# EAGLE board RedBot Accelerometer-Panel-v12a (EAGLE 6.6.0), part 1 of 4
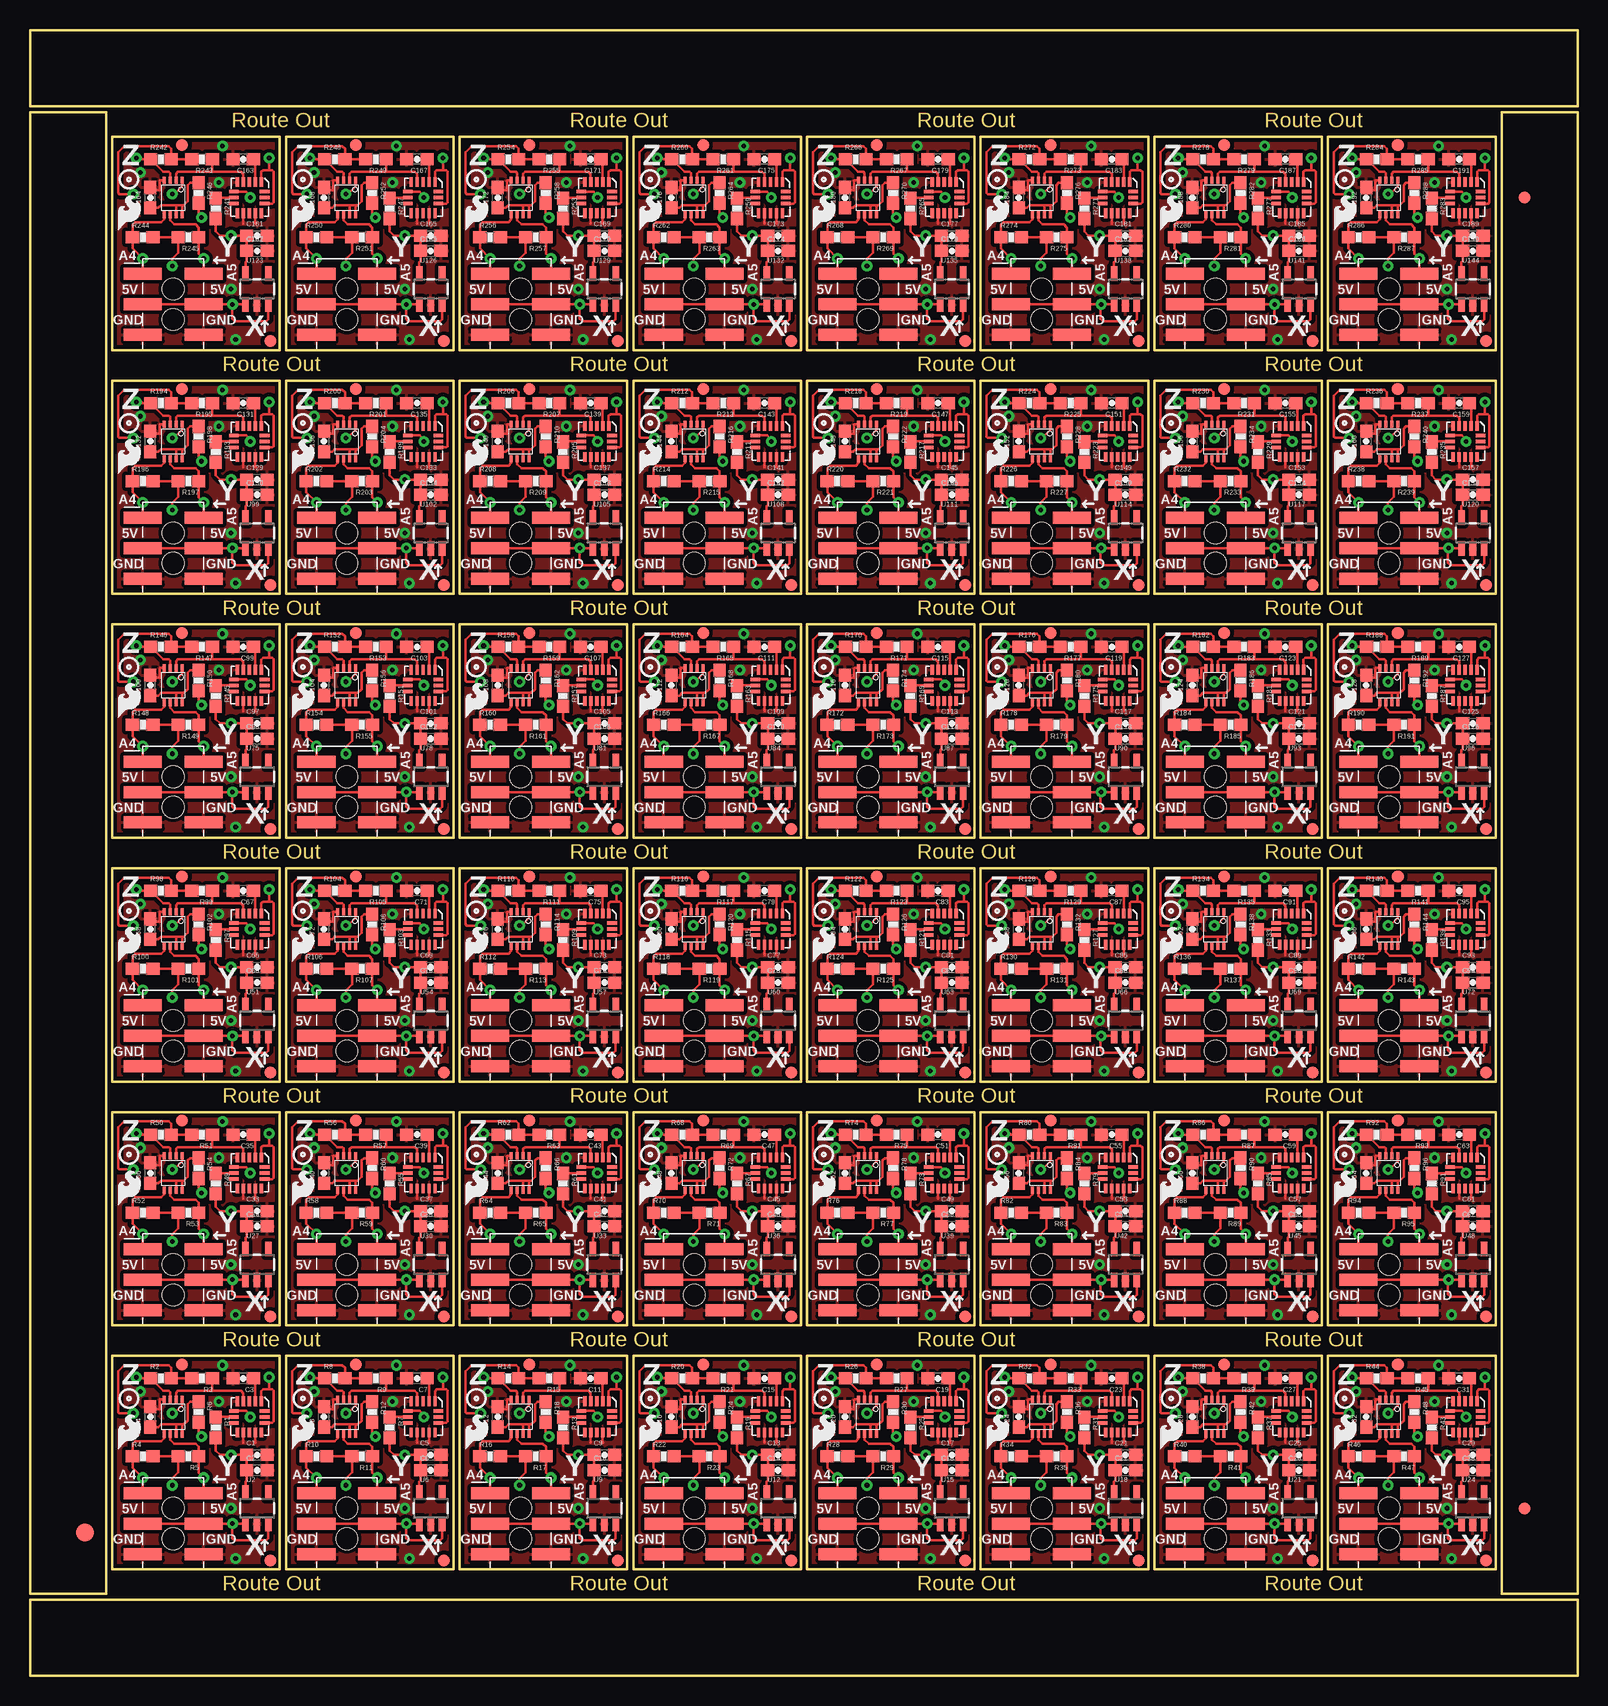
[diagram p0: board, top side]
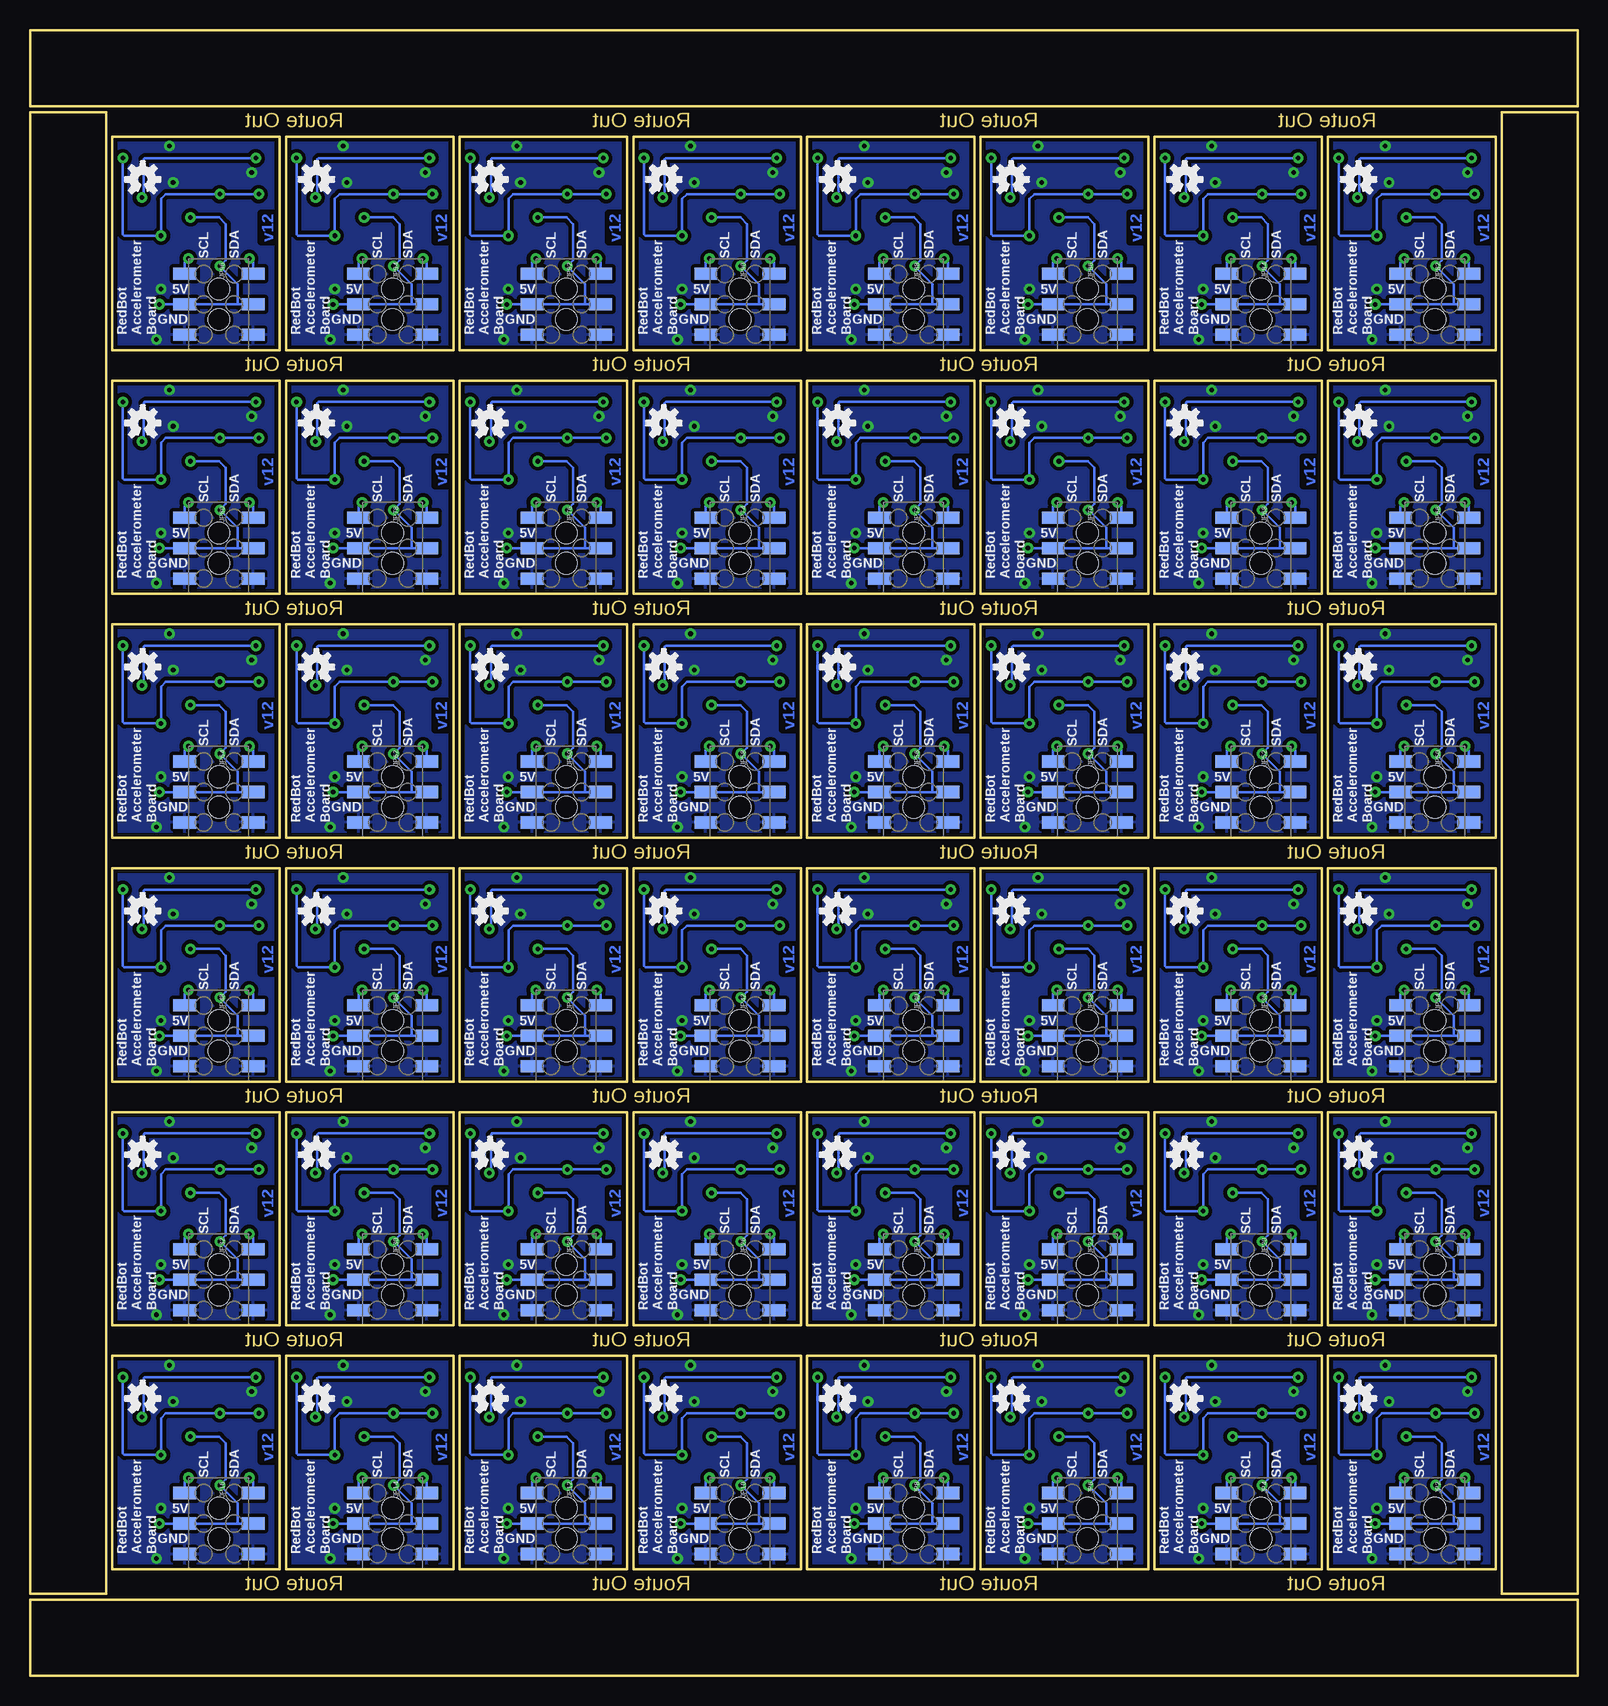
[diagram p1: board, bottom side, seen from below]

Size 129.03 x 137.16 mm. Coordinates in mm from the lower left corner, seen from the top.
Outline: 208 segments
Copper layers (1*16): Top 0.035mm / dielectric 1.5mm / Bottom 0.035mm
Design rules "SparkFun-2-layer": minimum track width 7mil, minimum drill 15mil, track to track 8mil, track to pad 8mil, pad to pad 8mil, via to via 8mil, smd to smd 8mil, copper to edge 8mil, drill to drill 8mil, minimum pad ring 12mil, minimum via ring 10mil, stop-mask expansion 4mil, vias tented up to drill 20mil, thermal gap 10mil

## Footprints (pad centres in the part's own frame; a part is rotated, then mirrored left to right if it is on the bottom)
0603-CAP = smd 1.1 x 1: 1 -0.85,0; 2 0.85,0
FIDUCIAL-1.5X3 = smd 1.5 x 1.5: 1 0,0
FIDUCIAL-1X2 = smd 1 x 1: 1 0,0
2X3_SMT_POSTS = smd 1 x 3.17: 1 -2.54,-2.54; 2 -2.54,2.54; 3 0,-2.54; 4 0,2.54; 5 2.54,-2.54; 6 2.54,2.54 | hole 1.8: -1.27,0; 1.27,0
2X3_SMD = smd 1.02 x 1.9: 1 -2.54,-2.85; 2 -2.54,2.85; 3 0,-2.85; 4 0,2.85; 5 2.54,-2.85; 6 2.54,2.85
0603-RES = smd 1.1 x 1: 1 -0.85,0; 2 0.85,0
MMA8452Q-1:1 = smd 0.8 x 0.275: 1 -1.3,1; 2 -1.3,0.5; 3 -1.3,0; 4 -1.3,-0.5; 5 -1.3,-1; 9 1.3,-1; 10 1.3,-0.5; 11 1.3,0; 12 1.3,0.5; 13 1.3,1 | smd 0.29 x 0.8: 6 -0.5,-1.275; 7 0,-1.275; 8 0.5,-1.275; 14 0.5,1.275; 15 0,1.275; 16 -0.5,1.275
SOT23-5 = smd 0.55 x 1.2: 1 -0.95,-1.3; 2 0,-1.3; 3 0.95,-1.3; 4 0.95,1.3; 5 -0.95,1.3
PCA9306DC-1:1 = smd 0.25 x 0.602: 1 -0.73,-1.446; 2 -0.23,-1.446; 3 0.27,-1.446; 4 0.77,-1.446; 5 0.77,1.431; 6 0.27,1.431; 7 -0.23,1.431; 8 -0.73,1.431

## Placement (x,y rotation side)
C1  0.1uF  [0603-CAP]  18.92,18.41 0 top
C2  4.7uF  [0603-CAP]  18.92,17.14 0 top
C3  0.1uF  [0603-CAP]  17.78,24.79 180 top
C4  0.1uF  [0603-CAP]  10.03,21.59 90 top
C5  0.1uF  [0603-CAP]  33.4,18.41 0 top
C6  4.7uF  [0603-CAP]  33.4,17.14 0 top
C7  0.1uF  [0603-CAP]  32.26,24.79 180 top
C8  0.1uF  [0603-CAP]  24.51,21.59 90 top
C9  0.1uF  [0603-CAP]  47.88,18.41 0 top
C10  4.7uF  [0603-CAP]  47.88,17.14 0 top
C11  0.1uF  [0603-CAP]  46.74,24.79 180 top
C12  0.1uF  [0603-CAP]  38.99,21.59 90 top
C13  0.1uF  [0603-CAP]  62.36,18.41 0 top
C14  4.7uF  [0603-CAP]  62.36,17.14 0 top
C15  0.1uF  [0603-CAP]  61.21,24.79 180 top
C16  0.1uF  [0603-CAP]  53.47,21.59 90 top
C17  0.1uF  [0603-CAP]  76.83,18.41 0 top
C18  4.7uF  [0603-CAP]  76.83,17.14 0 top
C19  0.1uF  [0603-CAP]  75.69,24.79 180 top
C20  0.1uF  [0603-CAP]  67.94,21.59 90 top
C21  0.1uF  [0603-CAP]  91.31,18.41 0 top
C22  4.7uF  [0603-CAP]  91.31,17.14 0 top
C23  0.1uF  [0603-CAP]  90.17,24.79 180 top
C24  0.1uF  [0603-CAP]  82.42,21.59 90 top
C25  0.1uF  [0603-CAP]  105.79,18.41 0 top
C26  4.7uF  [0603-CAP]  105.79,17.14 0 top
C27  0.1uF  [0603-CAP]  104.65,24.79 180 top
C28  0.1uF  [0603-CAP]  96.9,21.59 90 top
C29  0.1uF  [0603-CAP]  120.27,18.41 0 top
C30  4.7uF  [0603-CAP]  120.27,17.14 0 top
C31  0.1uF  [0603-CAP]  119.13,24.79 180 top
C32  0.1uF  [0603-CAP]  111.38,21.59 90 top
C33  0.1uF  [0603-CAP]  18.92,38.73 0 top
C34  4.7uF  [0603-CAP]  18.92,37.47 0 top
C35  0.1uF  [0603-CAP]  17.78,45.11 180 top
C36  0.1uF  [0603-CAP]  10.03,41.91 90 top
C37  0.1uF  [0603-CAP]  33.4,38.73 0 top
C38  4.7uF  [0603-CAP]  33.4,37.47 0 top
C39  0.1uF  [0603-CAP]  32.26,45.11 180 top
C40  0.1uF  [0603-CAP]  24.51,41.91 90 top
C41  0.1uF  [0603-CAP]  47.88,38.73 0 top
C42  4.7uF  [0603-CAP]  47.88,37.47 0 top
C43  0.1uF  [0603-CAP]  46.74,45.11 180 top
C44  0.1uF  [0603-CAP]  38.99,41.91 90 top
C45  0.1uF  [0603-CAP]  62.36,38.73 0 top
C46  4.7uF  [0603-CAP]  62.36,37.47 0 top
C47  0.1uF  [0603-CAP]  61.21,45.11 180 top
C48  0.1uF  [0603-CAP]  53.47,41.91 90 top
C49  0.1uF  [0603-CAP]  76.83,38.73 0 top
C50  4.7uF  [0603-CAP]  76.83,37.47 0 top
C51  0.1uF  [0603-CAP]  75.69,45.11 180 top
C52  0.1uF  [0603-CAP]  67.94,41.91 90 top
C53  0.1uF  [0603-CAP]  91.31,38.73 0 top
C54  4.7uF  [0603-CAP]  91.31,37.47 0 top
C55  0.1uF  [0603-CAP]  90.17,45.11 180 top
C56  0.1uF  [0603-CAP]  82.42,41.91 90 top
C57  0.1uF  [0603-CAP]  105.79,38.73 0 top
C58  4.7uF  [0603-CAP]  105.79,37.47 0 top
C59  0.1uF  [0603-CAP]  104.65,45.11 180 top
C60  0.1uF  [0603-CAP]  96.9,41.91 90 top
C61  0.1uF  [0603-CAP]  120.27,38.73 0 top
C62  4.7uF  [0603-CAP]  120.27,37.47 0 top
C63  0.1uF  [0603-CAP]  119.13,45.11 180 top
C64  0.1uF  [0603-CAP]  111.38,41.91 90 top
C65  0.1uF  [0603-CAP]  18.92,59.05 0 top
C66  4.7uF  [0603-CAP]  18.92,57.78 0 top
C67  0.1uF  [0603-CAP]  17.78,65.43 180 top
C68  0.1uF  [0603-CAP]  10.03,62.23 90 top
C69  0.1uF  [0603-CAP]  33.4,59.05 0 top
C70  4.7uF  [0603-CAP]  33.4,57.78 0 top
C71  0.1uF  [0603-CAP]  32.26,65.43 180 top
C72  0.1uF  [0603-CAP]  24.51,62.23 90 top
C73  0.1uF  [0603-CAP]  47.88,59.05 0 top
C74  4.7uF  [0603-CAP]  47.88,57.78 0 top
C75  0.1uF  [0603-CAP]  46.74,65.43 180 top
C76  0.1uF  [0603-CAP]  38.99,62.23 90 top
C77  0.1uF  [0603-CAP]  62.36,59.05 0 top
C78  4.7uF  [0603-CAP]  62.36,57.78 0 top
C79  0.1uF  [0603-CAP]  61.21,65.43 180 top
C80  0.1uF  [0603-CAP]  53.47,62.23 90 top
C81  0.1uF  [0603-CAP]  76.83,59.05 0 top
C82  4.7uF  [0603-CAP]  76.83,57.78 0 top
C83  0.1uF  [0603-CAP]  75.69,65.43 180 top
C84  0.1uF  [0603-CAP]  67.94,62.23 90 top
C85  0.1uF  [0603-CAP]  91.31,59.05 0 top
C86  4.7uF  [0603-CAP]  91.31,57.78 0 top
C87  0.1uF  [0603-CAP]  90.17,65.43 180 top
C88  0.1uF  [0603-CAP]  82.42,62.23 90 top
C89  0.1uF  [0603-CAP]  105.79,59.05 0 top
C90  4.7uF  [0603-CAP]  105.79,57.78 0 top
C91  0.1uF  [0603-CAP]  104.65,65.43 180 top
C92  0.1uF  [0603-CAP]  96.9,62.23 90 top
C93  0.1uF  [0603-CAP]  120.27,59.05 0 top
C94  4.7uF  [0603-CAP]  120.27,57.78 0 top
C95  0.1uF  [0603-CAP]  119.13,65.43 180 top
C96  0.1uF  [0603-CAP]  111.38,62.23 90 top
C97  0.1uF  [0603-CAP]  18.92,79.38 0 top
C98  4.7uF  [0603-CAP]  18.92,78.11 0 top
C99  0.1uF  [0603-CAP]  17.78,85.75 180 top
C100  0.1uF  [0603-CAP]  10.03,82.55 90 top
C101  0.1uF  [0603-CAP]  33.4,79.38 0 top
C102  4.7uF  [0603-CAP]  33.4,78.11 0 top
C103  0.1uF  [0603-CAP]  32.26,85.75 180 top
C104  0.1uF  [0603-CAP]  24.51,82.55 90 top
C105  0.1uF  [0603-CAP]  47.88,79.38 0 top
C106  4.7uF  [0603-CAP]  47.88,78.11 0 top
C107  0.1uF  [0603-CAP]  46.74,85.75 180 top
C108  0.1uF  [0603-CAP]  38.99,82.55 90 top
C109  0.1uF  [0603-CAP]  62.36,79.38 0 top
C110  4.7uF  [0603-CAP]  62.36,78.11 0 top
C111  0.1uF  [0603-CAP]  61.21,85.75 180 top
C112  0.1uF  [0603-CAP]  53.47,82.55 90 top
C113  0.1uF  [0603-CAP]  76.83,79.38 0 top
C114  4.7uF  [0603-CAP]  76.83,78.11 0 top
C115  0.1uF  [0603-CAP]  75.69,85.75 180 top
C116  0.1uF  [0603-CAP]  67.94,82.55 90 top
C117  0.1uF  [0603-CAP]  91.31,79.38 0 top
C118  4.7uF  [0603-CAP]  91.31,78.11 0 top
C119  0.1uF  [0603-CAP]  90.17,85.75 180 top
C120  0.1uF  [0603-CAP]  82.42,82.55 90 top
C121  0.1uF  [0603-CAP]  105.79,79.38 0 top
C122  4.7uF  [0603-CAP]  105.79,78.11 0 top
C123  0.1uF  [0603-CAP]  104.65,85.75 180 top
C124  0.1uF  [0603-CAP]  96.9,82.55 90 top
C125  0.1uF  [0603-CAP]  120.27,79.38 0 top
C126  4.7uF  [0603-CAP]  120.27,78.11 0 top
C127  0.1uF  [0603-CAP]  119.13,85.75 180 top
C128  0.1uF  [0603-CAP]  111.38,82.55 90 top
C129  0.1uF  [0603-CAP]  18.92,99.69 0 top
C130  4.7uF  [0603-CAP]  18.92,98.42 0 top
C131  0.1uF  [0603-CAP]  17.78,106.07 180 top
C132  0.1uF  [0603-CAP]  10.03,102.87 90 top
C133  0.1uF  [0603-CAP]  33.4,99.69 0 top
C134  4.7uF  [0603-CAP]  33.4,98.42 0 top
C135  0.1uF  [0603-CAP]  32.26,106.07 180 top
C136  0.1uF  [0603-CAP]  24.51,102.87 90 top
C137  0.1uF  [0603-CAP]  47.88,99.69 0 top
C138  4.7uF  [0603-CAP]  47.88,98.42 0 top
C139  0.1uF  [0603-CAP]  46.74,106.07 180 top
C140  0.1uF  [0603-CAP]  38.99,102.87 90 top
C141  0.1uF  [0603-CAP]  62.36,99.69 0 top
C142  4.7uF  [0603-CAP]  62.36,98.42 0 top
C143  0.1uF  [0603-CAP]  61.21,106.07 180 top
C144  0.1uF  [0603-CAP]  53.47,102.87 90 top
C145  0.1uF  [0603-CAP]  76.83,99.69 0 top
C146  4.7uF  [0603-CAP]  76.83,98.42 0 top
C147  0.1uF  [0603-CAP]  75.69,106.07 180 top
C148  0.1uF  [0603-CAP]  67.94,102.87 90 top
C149  0.1uF  [0603-CAP]  91.31,99.69 0 top
C150  4.7uF  [0603-CAP]  91.31,98.42 0 top
C151  0.1uF  [0603-CAP]  90.17,106.07 180 top
C152  0.1uF  [0603-CAP]  82.42,102.87 90 top
C153  0.1uF  [0603-CAP]  105.79,99.69 0 top
C154  4.7uF  [0603-CAP]  105.79,98.42 0 top
C155  0.1uF  [0603-CAP]  104.65,106.07 180 top
C156  0.1uF  [0603-CAP]  96.9,102.87 90 top
C157  0.1uF  [0603-CAP]  120.27,99.69 0 top
C158  4.7uF  [0603-CAP]  120.27,98.42 0 top
C159  0.1uF  [0603-CAP]  119.13,106.07 180 top
C160  0.1uF  [0603-CAP]  111.38,102.87 90 top
C161  0.1uF  [0603-CAP]  18.92,120.02 0 top
C162  4.7uF  [0603-CAP]  18.92,118.75 0 top
C163  0.1uF  [0603-CAP]  17.78,126.39 180 top
C164  0.1uF  [0603-CAP]  10.03,123.19 90 top
C165  0.1uF  [0603-CAP]  33.4,120.02 0 top
C166  4.7uF  [0603-CAP]  33.4,118.75 0 top
C167  0.1uF  [0603-CAP]  32.26,126.39 180 top
C168  0.1uF  [0603-CAP]  24.51,123.19 90 top
C169  0.1uF  [0603-CAP]  47.88,120.02 0 top
C170  4.7uF  [0603-CAP]  47.88,118.75 0 top
C171  0.1uF  [0603-CAP]  46.74,126.39 180 top
C172  0.1uF  [0603-CAP]  38.99,123.19 90 top
C173  0.1uF  [0603-CAP]  62.36,120.02 0 top
C174  4.7uF  [0603-CAP]  62.36,118.75 0 top
C175  0.1uF  [0603-CAP]  61.21,126.39 180 top
C176  0.1uF  [0603-CAP]  53.47,123.19 90 top
C177  0.1uF  [0603-CAP]  76.83,120.02 0 top
C178  4.7uF  [0603-CAP]  76.83,118.75 0 top
C179  0.1uF  [0603-CAP]  75.69,126.39 180 top
C180  0.1uF  [0603-CAP]  67.94,123.19 90 top
C181  0.1uF  [0603-CAP]  91.31,120.02 0 top
C182  4.7uF  [0603-CAP]  91.31,118.75 0 top
C183  0.1uF  [0603-CAP]  90.17,126.39 180 top
C184  0.1uF  [0603-CAP]  82.42,123.19 90 top
C185  0.1uF  [0603-CAP]  105.79,120.02 0 top
C186  4.7uF  [0603-CAP]  105.79,118.75 0 top
C187  0.1uF  [0603-CAP]  104.65,126.39 180 top
C188  0.1uF  [0603-CAP]  96.9,123.19 90 top
C189  0.1uF  [0603-CAP]  120.27,120.02 0 top
C190  4.7uF  [0603-CAP]  120.27,118.75 0 top
C191  0.1uF  [0603-CAP]  119.13,126.39 180 top
C192  0.1uF  [0603-CAP]  111.38,123.19 90 top
E$1  [FIDUCIAL-1.5X3]  4.57,11.94 0 top
E$2  [FIDUCIAL-1X2]  124.59,13.97 0 top
E$3  [FIDUCIAL-1X2]  124.59,123.19 180 top
FID1  FIDUCIAL1X2  [FIDUCIAL-1X2]  12.67,25.96 0 top
FID2  FIDUCIAL1X2  [FIDUCIAL-1X2]  34.52,9.63 0 top
FID3  FIDUCIAL1X2  [FIDUCIAL-1X2]  20.04,9.63 0 top
FID4  FIDUCIAL1X2  [FIDUCIAL-1X2]  27.15,25.96 0 top
FID5  FIDUCIAL1X2  [FIDUCIAL-1X2]  49,9.63 0 top
FID6  FIDUCIAL1X2  [FIDUCIAL-1X2]  41.63,25.96 0 top
FID7  FIDUCIAL1X2  [FIDUCIAL-1X2]  63.47,9.63 0 top
FID8  FIDUCIAL1X2  [FIDUCIAL-1X2]  56.11,25.96 0 top
FID9  FIDUCIAL1X2  [FIDUCIAL-1X2]  77.95,9.63 0 top
FID10  FIDUCIAL1X2  [FIDUCIAL-1X2]  70.59,25.96 0 top
FID11  FIDUCIAL1X2  [FIDUCIAL-1X2]  92.43,9.63 0 top
FID12  FIDUCIAL1X2  [FIDUCIAL-1X2]  85.06,25.96 0 top
FID13  FIDUCIAL1X2  [FIDUCIAL-1X2]  106.91,9.63 0 top
FID14  FIDUCIAL1X2  [FIDUCIAL-1X2]  99.54,25.96 0 top
FID15  FIDUCIAL1X2  [FIDUCIAL-1X2]  121.39,9.63 0 top
FID16  FIDUCIAL1X2  [FIDUCIAL-1X2]  114.02,25.96 0 top
FID17  FIDUCIAL1X2  [FIDUCIAL-1X2]  20.04,29.95 0 top
FID18  FIDUCIAL1X2  [FIDUCIAL-1X2]  12.67,46.28 0 top
FID19  FIDUCIAL1X2  [FIDUCIAL-1X2]  34.52,29.95 0 top
FID20  FIDUCIAL1X2  [FIDUCIAL-1X2]  27.15,46.28 0 top
FID21  FIDUCIAL1X2  [FIDUCIAL-1X2]  49,29.95 0 top
FID22  FIDUCIAL1X2  [FIDUCIAL-1X2]  41.63,46.28 0 top
FID23  FIDUCIAL1X2  [FIDUCIAL-1X2]  63.47,29.95 0 top
FID24  FIDUCIAL1X2  [FIDUCIAL-1X2]  56.11,46.28 0 top
FID25  FIDUCIAL1X2  [FIDUCIAL-1X2]  77.95,29.95 0 top
FID26  FIDUCIAL1X2  [FIDUCIAL-1X2]  70.59,46.28 0 top
FID27  FIDUCIAL1X2  [FIDUCIAL-1X2]  92.43,29.95 0 top
FID28  FIDUCIAL1X2  [FIDUCIAL-1X2]  85.06,46.28 0 top
FID29  FIDUCIAL1X2  [FIDUCIAL-1X2]  106.91,29.95 0 top
FID30  FIDUCIAL1X2  [FIDUCIAL-1X2]  99.54,46.28 0 top
FID31  FIDUCIAL1X2  [FIDUCIAL-1X2]  121.39,29.95 0 top
FID32  FIDUCIAL1X2  [FIDUCIAL-1X2]  114.02,46.28 0 top
FID33  FIDUCIAL1X2  [FIDUCIAL-1X2]  20.04,50.27 0 top
FID34  FIDUCIAL1X2  [FIDUCIAL-1X2]  12.67,66.6 0 top
FID35  FIDUCIAL1X2  [FIDUCIAL-1X2]  34.52,50.27 0 top
FID36  FIDUCIAL1X2  [FIDUCIAL-1X2]  27.15,66.6 0 top
FID37  FIDUCIAL1X2  [FIDUCIAL-1X2]  49,50.27 0 top
FID38  FIDUCIAL1X2  [FIDUCIAL-1X2]  41.63,66.6 0 top
FID39  FIDUCIAL1X2  [FIDUCIAL-1X2]  63.47,50.27 0 top
FID40  FIDUCIAL1X2  [FIDUCIAL-1X2]  56.11,66.6 0 top
FID41  FIDUCIAL1X2  [FIDUCIAL-1X2]  77.95,50.27 0 top
FID42  FIDUCIAL1X2  [FIDUCIAL-1X2]  70.59,66.6 0 top
FID43  FIDUCIAL1X2  [FIDUCIAL-1X2]  92.43,50.27 0 top
FID44  FIDUCIAL1X2  [FIDUCIAL-1X2]  85.06,66.6 0 top
FID45  FIDUCIAL1X2  [FIDUCIAL-1X2]  106.91,50.27 0 top
FID46  FIDUCIAL1X2  [FIDUCIAL-1X2]  99.54,66.6 0 top
FID47  FIDUCIAL1X2  [FIDUCIAL-1X2]  121.39,50.27 0 top
FID48  FIDUCIAL1X2  [FIDUCIAL-1X2]  114.02,66.6 0 top
FID49  FIDUCIAL1X2  [FIDUCIAL-1X2]  20.04,70.59 0 top
FID50  FIDUCIAL1X2  [FIDUCIAL-1X2]  12.67,86.92 0 top
FID51  FIDUCIAL1X2  [FIDUCIAL-1X2]  34.52,70.59 0 top
FID52  FIDUCIAL1X2  [FIDUCIAL-1X2]  27.15,86.92 0 top
FID53  FIDUCIAL1X2  [FIDUCIAL-1X2]  49,70.59 0 top
FID54  FIDUCIAL1X2  [FIDUCIAL-1X2]  41.63,86.92 0 top
FID55  FIDUCIAL1X2  [FIDUCIAL-1X2]  63.47,70.59 0 top
FID56  FIDUCIAL1X2  [FIDUCIAL-1X2]  56.11,86.92 0 top
FID57  FIDUCIAL1X2  [FIDUCIAL-1X2]  77.95,70.59 0 top
FID58  FIDUCIAL1X2  [FIDUCIAL-1X2]  70.59,86.92 0 top
FID59  FIDUCIAL1X2  [FIDUCIAL-1X2]  92.43,70.59 0 top
FID60  FIDUCIAL1X2  [FIDUCIAL-1X2]  85.06,86.92 0 top
FID61  FIDUCIAL1X2  [FIDUCIAL-1X2]  106.91,70.59 0 top
FID62  FIDUCIAL1X2  [FIDUCIAL-1X2]  99.54,86.92 0 top
FID63  FIDUCIAL1X2  [FIDUCIAL-1X2]  121.39,70.59 0 top
FID64  FIDUCIAL1X2  [FIDUCIAL-1X2]  114.02,86.92 0 top
FID65  FIDUCIAL1X2  [FIDUCIAL-1X2]  20.04,90.91 0 top
FID66  FIDUCIAL1X2  [FIDUCIAL-1X2]  12.67,107.24 0 top
FID67  FIDUCIAL1X2  [FIDUCIAL-1X2]  34.52,90.91 0 top
FID68  FIDUCIAL1X2  [FIDUCIAL-1X2]  27.15,107.24 0 top
FID69  FIDUCIAL1X2  [FIDUCIAL-1X2]  49,90.91 0 top
FID70  FIDUCIAL1X2  [FIDUCIAL-1X2]  41.63,107.24 0 top
FID71  FIDUCIAL1X2  [FIDUCIAL-1X2]  63.47,90.91 0 top
FID72  FIDUCIAL1X2  [FIDUCIAL-1X2]  56.11,107.24 0 top
FID73  FIDUCIAL1X2  [FIDUCIAL-1X2]  77.95,90.91 0 top
FID74  FIDUCIAL1X2  [FIDUCIAL-1X2]  70.59,107.24 0 top
FID75  FIDUCIAL1X2  [FIDUCIAL-1X2]  92.43,90.91 0 top
FID76  FIDUCIAL1X2  [FIDUCIAL-1X2]  85.06,107.24 0 top
FID77  FIDUCIAL1X2  [FIDUCIAL-1X2]  106.91,90.91 0 top
FID78  FIDUCIAL1X2  [FIDUCIAL-1X2]  99.54,107.24 0 top
FID79  FIDUCIAL1X2  [FIDUCIAL-1X2]  121.39,90.91 0 top
FID80  FIDUCIAL1X2  [FIDUCIAL-1X2]  114.02,107.24 0 top
FID81  FIDUCIAL1X2  [FIDUCIAL-1X2]  20.04,111.23 0 top
FID82  FIDUCIAL1X2  [FIDUCIAL-1X2]  12.67,127.56 0 top
FID83  FIDUCIAL1X2  [FIDUCIAL-1X2]  34.52,111.23 0 top
FID84  FIDUCIAL1X2  [FIDUCIAL-1X2]  27.15,127.56 0 top
FID85  FIDUCIAL1X2  [FIDUCIAL-1X2]  49,111.23 0 top
FID86  FIDUCIAL1X2  [FIDUCIAL-1X2]  41.63,127.56 0 top
FID87  FIDUCIAL1X2  [FIDUCIAL-1X2]  63.47,111.23 0 top
FID88  FIDUCIAL1X2  [FIDUCIAL-1X2]  56.11,127.56 0 top
FID89  FIDUCIAL1X2  [FIDUCIAL-1X2]  77.95,111.23 0 top
FID90  FIDUCIAL1X2  [FIDUCIAL-1X2]  70.59,127.56 0 top
FID91  FIDUCIAL1X2  [FIDUCIAL-1X2]  92.43,111.23 0 top
FID92  FIDUCIAL1X2  [FIDUCIAL-1X2]  85.06,127.56 0 top
FID93  FIDUCIAL1X2  [FIDUCIAL-1X2]  106.91,111.23 0 top
FID94  FIDUCIAL1X2  [FIDUCIAL-1X2]  99.54,127.56 0 top
FID95  FIDUCIAL1X2  [FIDUCIAL-1X2]  121.39,111.23 0 top
FID96  FIDUCIAL1X2  [FIDUCIAL-1X2]  114.02,127.56 0 top
JP1  [2X3_SMT_POSTS]  11.94,12.7 270 top
JP2  [2X3_SMD]  11.94,12.7 270 bottom
JP3  [2X3_SMT_POSTS]  26.42,12.7 270 top
JP4  [2X3_SMD]  26.42,12.7 270 bottom
JP5  [2X3_SMT_POSTS]  40.89,12.7 270 top
JP6  [2X3_SMD]  40.89,12.7 270 bottom
JP7  [2X3_SMT_POSTS]  55.37,12.7 270 top
JP8  [2X3_SMD]  55.37,12.7 270 bottom
JP9  [2X3_SMT_POSTS]  69.85,12.7 270 top
JP10  [2X3_SMD]  69.85,12.7 270 bottom
JP11  [2X3_SMT_POSTS]  84.33,12.7 270 top
JP12  [2X3_SMD]  84.33,12.7 270 bottom
JP13  [2X3_SMT_POSTS]  98.81,12.7 270 top
JP14  [2X3_SMD]  98.81,12.7 270 bottom
JP15  [2X3_SMT_POSTS]  113.28,12.7 270 top
JP16  [2X3_SMD]  113.28,12.7 270 bottom
JP17  [2X3_SMT_POSTS]  11.94,33.02 270 top
JP18  [2X3_SMD]  11.94,33.02 270 bottom
JP19  [2X3_SMT_POSTS]  26.42,33.02 270 top
JP20  [2X3_SMD]  26.42,33.02 270 bottom
JP21  [2X3_SMT_POSTS]  40.89,33.02 270 top
JP22  [2X3_SMD]  40.89,33.02 270 bottom
JP23  [2X3_SMT_POSTS]  55.37,33.02 270 top
JP24  [2X3_SMD]  55.37,33.02 270 bottom
JP25  [2X3_SMT_POSTS]  69.85,33.02 270 top
JP26  [2X3_SMD]  69.85,33.02 270 bottom
JP27  [2X3_SMT_POSTS]  84.33,33.02 270 top
JP28  [2X3_SMD]  84.33,33.02 270 bottom
JP29  [2X3_SMT_POSTS]  98.81,33.02 270 top
JP30  [2X3_SMD]  98.81,33.02 270 bottom
JP31  [2X3_SMT_POSTS]  113.28,33.02 270 top
JP32  [2X3_SMD]  113.28,33.02 270 bottom
JP33  [2X3_SMT_POSTS]  11.94,53.34 270 top
JP34  [2X3_SMD]  11.94,53.34 270 bottom
JP35  [2X3_SMT_POSTS]  26.42,53.34 270 top
JP36  [2X3_SMD]  26.42,53.34 270 bottom
JP37  [2X3_SMT_POSTS]  40.89,53.34 270 top
JP38  [2X3_SMD]  40.89,53.34 270 bottom
JP39  [2X3_SMT_POSTS]  55.37,53.34 270 top
JP40  [2X3_SMD]  55.37,53.34 270 bottom
JP41  [2X3_SMT_POSTS]  69.85,53.34 270 top
JP42  [2X3_SMD]  69.85,53.34 270 bottom
JP43  [2X3_SMT_POSTS]  84.33,53.34 270 top
JP44  [2X3_SMD]  84.33,53.34 270 bottom
JP45  [2X3_SMT_POSTS]  98.81,53.34 270 top
JP46  [2X3_SMD]  98.81,53.34 270 bottom
JP47  [2X3_SMT_POSTS]  113.28,53.34 270 top
JP48  [2X3_SMD]  113.28,53.34 270 bottom
JP49  [2X3_SMT_POSTS]  11.94,73.66 270 top
JP50  [2X3_SMD]  11.94,73.66 270 bottom
JP51  [2X3_SMT_POSTS]  26.42,73.66 270 top
JP52  [2X3_SMD]  26.42,73.66 270 bottom
JP53  [2X3_SMT_POSTS]  40.89,73.66 270 top
JP54  [2X3_SMD]  40.89,73.66 270 bottom
JP55  [2X3_SMT_POSTS]  55.37,73.66 270 top
JP56  [2X3_SMD]  55.37,73.66 270 bottom
JP57  [2X3_SMT_POSTS]  69.85,73.66 270 top
JP58  [2X3_SMD]  69.85,73.66 270 bottom
JP59  [2X3_SMT_POSTS]  84.33,73.66 270 top
JP60  [2X3_SMD]  84.33,73.66 270 bottom
JP61  [2X3_SMT_POSTS]  98.81,73.66 270 top
JP62  [2X3_SMD]  98.81,73.66 270 bottom
JP63  [2X3_SMT_POSTS]  113.28,73.66 270 top
JP64  [2X3_SMD]  113.28,73.66 270 bottom
JP65  [2X3_SMT_POSTS]  11.94,93.98 270 top
JP66  [2X3_SMD]  11.94,93.98 270 bottom
JP67  [2X3_SMT_POSTS]  26.42,93.98 270 top
JP68  [2X3_SMD]  26.42,93.98 270 bottom
JP69  [2X3_SMT_POSTS]  40.89,93.98 270 top
JP70  [2X3_SMD]  40.89,93.98 270 bottom
JP71  [2X3_SMT_POSTS]  55.37,93.98 270 top
JP72  [2X3_SMD]  55.37,93.98 270 bottom
JP73  [2X3_SMT_POSTS]  69.85,93.98 270 top
JP74  [2X3_SMD]  69.85,93.98 270 bottom
JP75  [2X3_SMT_POSTS]  84.33,93.98 270 top
JP76  [2X3_SMD]  84.33,93.98 270 bottom
JP77  [2X3_SMT_POSTS]  98.81,93.98 270 top
JP78  [2X3_SMD]  98.81,93.98 270 bottom
JP79  [2X3_SMT_POSTS]  113.28,93.98 270 top
JP80  [2X3_SMD]  113.28,93.98 270 bottom
JP81  [2X3_SMT_POSTS]  11.94,114.3 270 top
JP82  [2X3_SMD]  11.94,114.3 270 bottom
JP83  [2X3_SMT_POSTS]  26.42,114.3 270 top
JP84  [2X3_SMD]  26.42,114.3 270 bottom
JP85  [2X3_SMT_POSTS]  40.89,114.3 270 top
JP86  [2X3_SMD]  40.89,114.3 270 bottom
JP87  [2X3_SMT_POSTS]  55.37,114.3 270 top
JP88  [2X3_SMD]  55.37,114.3 270 bottom
JP89  [2X3_SMT_POSTS]  69.85,114.3 270 top
JP90  [2X3_SMD]  69.85,114.3 270 bottom
JP91  [2X3_SMT_POSTS]  84.33,114.3 270 top
JP92  [2X3_SMD]  84.33,114.3 270 bottom
JP93  [2X3_SMT_POSTS]  98.81,114.3 270 top
JP94  [2X3_SMD]  98.81,114.3 270 bottom
JP95  [2X3_SMT_POSTS]  113.28,114.3 270 top
JP96  [2X3_SMD]  113.28,114.3 270 bottom
LOGO1  LOGO-SFESK  [SFE-LOGO-FLAME]  7.37,18.92 0 top
LOGO2  OSHW-LOGOS  [OSHW-LOGO-S]  18.29,23.11 0 bottom
LOGO3  LOGO-SFESK  [SFE-LOGO-FLAME]  21.84,18.92 0 top
LOGO4  OSHW-LOGOS  [OSHW-LOGO-S]  32.77,23.11 0 bottom
LOGO5  LOGO-SFESK  [SFE-LOGO-FLAME]  36.32,18.92 0 top
LOGO6  OSHW-LOGOS  [OSHW-LOGO-S]  47.24,23.11 0 bottom
LOGO7  LOGO-SFESK  [SFE-LOGO-FLAME]  50.8,18.92 0 top
LOGO8  OSHW-LOGOS  [OSHW-LOGO-S]  61.72,23.11 0 bottom
LOGO9  LOGO-SFESK  [SFE-LOGO-FLAME]  65.28,18.92 0 top
LOGO10  OSHW-LOGOS  [OSHW-LOGO-S]  76.2,23.11 0 bottom
LOGO11  LOGO-SFESK  [SFE-LOGO-FLAME]  79.76,18.92 0 top
LOGO12  OSHW-LOGOS  [OSHW-LOGO-S]  90.68,23.11 0 bottom
LOGO13  LOGO-SFESK  [SFE-LOGO-FLAME]  94.23,18.92 0 top
LOGO14  OSHW-LOGOS  [OSHW-LOGO-S]  105.16,23.11 0 bottom
LOGO15  LOGO-SFESK  [SFE-LOGO-FLAME]  108.71,18.92 0 top
LOGO16  OSHW-LOGOS  [OSHW-LOGO-S]  119.63,23.11 0 bottom
LOGO17  LOGO-SFESK  [SFE-LOGO-FLAME]  7.37,39.24 0 top
LOGO18  OSHW-LOGOS  [OSHW-LOGO-S]  18.29,43.43 0 bottom
LOGO19  LOGO-SFESK  [SFE-LOGO-FLAME]  21.84,39.24 0 top
LOGO20  OSHW-LOGOS  [OSHW-LOGO-S]  32.77,43.43 0 bottom
LOGO21  LOGO-SFESK  [SFE-LOGO-FLAME]  36.32,39.24 0 top
LOGO22  OSHW-LOGOS  [OSHW-LOGO-S]  47.24,43.43 0 bottom
LOGO23  LOGO-SFESK  [SFE-LOGO-FLAME]  50.8,39.24 0 top
LOGO24  OSHW-LOGOS  [OSHW-LOGO-S]  61.72,43.43 0 bottom
LOGO25  LOGO-SFESK  [SFE-LOGO-FLAME]  65.28,39.24 0 top
LOGO26  OSHW-LOGOS  [OSHW-LOGO-S]  76.2,43.43 0 bottom
LOGO27  LOGO-SFESK  [SFE-LOGO-FLAME]  79.76,39.24 0 top
LOGO28  OSHW-LOGOS  [OSHW-LOGO-S]  90.68,43.43 0 bottom
LOGO29  LOGO-SFESK  [SFE-LOGO-FLAME]  94.23,39.24 0 top
LOGO30  OSHW-LOGOS  [OSHW-LOGO-S]  105.16,43.43 0 bottom
LOGO31  LOGO-SFESK  [SFE-LOGO-FLAME]  108.71,39.24 0 top
LOGO32  OSHW-LOGOS  [OSHW-LOGO-S]  119.63,43.43 0 bottom
LOGO33  LOGO-SFESK  [SFE-LOGO-FLAME]  7.37,59.56 0 top
LOGO34  OSHW-LOGOS  [OSHW-LOGO-S]  18.29,63.75 0 bottom
LOGO35  LOGO-SFESK  [SFE-LOGO-FLAME]  21.84,59.56 0 top
LOGO36  OSHW-LOGOS  [OSHW-LOGO-S]  32.77,63.75 0 bottom
LOGO37  LOGO-SFESK  [SFE-LOGO-FLAME]  36.32,59.56 0 top
LOGO38  OSHW-LOGOS  [OSHW-LOGO-S]  47.24,63.75 0 bottom
LOGO39  LOGO-SFESK  [SFE-LOGO-FLAME]  50.8,59.56 0 top
LOGO40  OSHW-LOGOS  [OSHW-LOGO-S]  61.72,63.75 0 bottom
LOGO41  LOGO-SFESK  [SFE-LOGO-FLAME]  65.28,59.56 0 top
LOGO42  OSHW-LOGOS  [OSHW-LOGO-S]  76.2,63.75 0 bottom
LOGO43  LOGO-SFESK  [SFE-LOGO-FLAME]  79.76,59.56 0 top
LOGO44  OSHW-LOGOS  [OSHW-LOGO-S]  90.68,63.75 0 bottom
LOGO45  LOGO-SFESK  [SFE-LOGO-FLAME]  94.23,59.56 0 top
LOGO46  OSHW-LOGOS  [OSHW-LOGO-S]  105.16,63.75 0 bottom
LOGO47  LOGO-SFESK  [SFE-LOGO-FLAME]  108.71,59.56 0 top
LOGO48  OSHW-LOGOS  [OSHW-LOGO-S]  119.63,63.75 0 bottom
LOGO49  LOGO-SFESK  [SFE-LOGO-FLAME]  7.37,79.88 0 top
LOGO50  OSHW-LOGOS  [OSHW-LOGO-S]  18.29,84.07 0 bottom
LOGO51  LOGO-SFESK  [SFE-LOGO-FLAME]  21.84,79.88 0 top
LOGO52  OSHW-LOGOS  [OSHW-LOGO-S]  32.77,84.07 0 bottom
LOGO53  LOGO-SFESK  [SFE-LOGO-FLAME]  36.32,79.88 0 top
LOGO54  OSHW-LOGOS  [OSHW-LOGO-S]  47.24,84.07 0 bottom
LOGO55  LOGO-SFESK  [SFE-LOGO-FLAME]  50.8,79.88 0 top
LOGO56  OSHW-LOGOS  [OSHW-LOGO-S]  61.72,84.07 0 bottom
LOGO57  LOGO-SFESK  [SFE-LOGO-FLAME]  65.28,79.88 0 top
LOGO58  OSHW-LOGOS  [OSHW-LOGO-S]  76.2,84.07 0 bottom
LOGO59  LOGO-SFESK  [SFE-LOGO-FLAME]  79.76,79.88 0 top
LOGO60  OSHW-LOGOS  [OSHW-LOGO-S]  90.68,84.07 0 bottom
LOGO61  LOGO-SFESK  [SFE-LOGO-FLAME]  94.23,79.88 0 top
LOGO62  OSHW-LOGOS  [OSHW-LOGO-S]  105.16,84.07 0 bottom
LOGO63  LOGO-SFESK  [SFE-LOGO-FLAME]  108.71,79.88 0 top
LOGO64  OSHW-LOGOS  [OSHW-LOGO-S]  119.63,84.07 0 bottom
LOGO65  LOGO-SFESK  [SFE-LOGO-FLAME]  7.37,100.2 0 top
LOGO66  OSHW-LOGOS  [OSHW-LOGO-S]  18.29,104.39 0 bottom
LOGO67  LOGO-SFESK  [SFE-LOGO-FLAME]  21.84,100.2 0 top
LOGO68  OSHW-LOGOS  [OSHW-LOGO-S]  32.77,104.39 0 bottom
LOGO69  LOGO-SFESK  [SFE-LOGO-FLAME]  36.32,100.2 0 top
LOGO70  OSHW-LOGOS  [OSHW-LOGO-S]  47.24,104.39 0 bottom
LOGO71  LOGO-SFESK  [SFE-LOGO-FLAME]  50.8,100.2 0 top
LOGO72  OSHW-LOGOS  [OSHW-LOGO-S]  61.72,104.39 0 bottom
LOGO73  LOGO-SFESK  [SFE-LOGO-FLAME]  65.28,100.2 0 top
LOGO74  OSHW-LOGOS  [OSHW-LOGO-S]  76.2,104.39 0 bottom
LOGO75  LOGO-SFESK  [SFE-LOGO-FLAME]  79.76,100.2 0 top
LOGO76  OSHW-LOGOS  [OSHW-LOGO-S]  90.68,104.39 0 bottom
LOGO77  LOGO-SFESK  [SFE-LOGO-FLAME]  94.23,100.2 0 top
LOGO78  OSHW-LOGOS  [OSHW-LOGO-S]  105.16,104.39 0 bottom
LOGO79  LOGO-SFESK  [SFE-LOGO-FLAME]  108.71,100.2 0 top
LOGO80  OSHW-LOGOS  [OSHW-LOGO-S]  119.63,104.39 0 bottom
LOGO81  LOGO-SFESK  [SFE-LOGO-FLAME]  7.37,120.52 0 top
LOGO82  OSHW-LOGOS  [OSHW-LOGO-S]  18.29,124.71 0 bottom
LOGO83  LOGO-SFESK  [SFE-LOGO-FLAME]  21.84,120.52 0 top
LOGO84  OSHW-LOGOS  [OSHW-LOGO-S]  32.77,124.71 0 bottom
LOGO85  LOGO-SFESK  [SFE-LOGO-FLAME]  36.32,120.52 0 top
LOGO86  OSHW-LOGOS  [OSHW-LOGO-S]  47.24,124.71 0 bottom
LOGO87  LOGO-SFESK  [SFE-LOGO-FLAME]  50.8,120.52 0 top
LOGO88  OSHW-LOGOS  [OSHW-LOGO-S]  61.72,124.71 0 bottom
LOGO89  LOGO-SFESK  [SFE-LOGO-FLAME]  65.28,120.52 0 top
LOGO90  OSHW-LOGOS  [OSHW-LOGO-S]  76.2,124.71 0 bottom
LOGO91  LOGO-SFESK  [SFE-LOGO-FLAME]  79.76,120.52 0 top
LOGO92  OSHW-LOGOS  [OSHW-LOGO-S]  90.68,124.71 0 bottom
LOGO93  LOGO-SFESK  [SFE-LOGO-FLAME]  94.23,120.52 0 top
LOGO94  OSHW-LOGOS  [OSHW-LOGO-S]  105.16,124.71 0 bottom
LOGO95  LOGO-SFESK  [SFE-LOGO-FLAME]  108.71,120.52 0 top
LOGO96  OSHW-LOGOS  [OSHW-LOGO-S]  119.63,124.71 0 bottom
R1  10k  [0603-RES]  15.49,20.7 270 top
R2  1k  [0603-RES]  10.92,24.79 0 top
R3  1k  [0603-RES]  14.35,24.79 180 top
R4  1k  [0603-RES]  9.4,18.29 0 top
R5  1k  [0603-RES]  13.21,18.29 180 top
R6  200k  [0603-RES]  14.04,21.99 270 top
R7  10k  [0603-RES]  29.97,20.7 270 top
R8  1k  [0603-RES]  25.4,24.79 0 top
R9  1k  [0603-RES]  28.83,24.79 180 top
R10  1k  [0603-RES]  23.88,18.29 0 top
R11  1k  [0603-RES]  27.69,18.29 180 top
R12  200k  [0603-RES]  28.52,21.99 270 top
R13  10k  [0603-RES]  44.45,20.7 270 top
R14  1k  [0603-RES]  39.88,24.79 0 top
R15  1k  [0603-RES]  43.31,24.79 180 top
R16  1k  [0603-RES]  38.35,18.29 0 top
R17  1k  [0603-RES]  42.16,18.29 180 top
R18  200k  [0603-RES]  43,21.99 270 top
R19  10k  [0603-RES]  58.93,20.7 270 top
R20  1k  [0603-RES]  54.36,24.79 0 top
R21  1k  [0603-RES]  57.78,24.79 180 top
R22  1k  [0603-RES]  52.83,18.29 0 top
R23  1k  [0603-RES]  56.64,18.29 180 top
R24  200k  [0603-RES]  57.48,21.99 270 top
R25  10k  [0603-RES]  73.41,20.7 270 top
R26  1k  [0603-RES]  68.83,24.79 0 top
R27  1k  [0603-RES]  72.26,24.79 180 top
R28  1k  [0603-RES]  67.31,18.29 0 top
R29  1k  [0603-RES]  71.12,18.29 180 top
R30  200k  [0603-RES]  71.95,21.99 270 top
R31  10k  [0603-RES]  87.88,20.7 270 top
R32  1k  [0603-RES]  83.31,24.79 0 top
R33  1k  [0603-RES]  86.74,24.79 180 top
R34  1k  [0603-RES]  81.79,18.29 0 top
R35  1k  [0603-RES]  85.6,18.29 180 top
R36  200k  [0603-RES]  86.43,21.99 270 top
R37  10k  [0603-RES]  102.36,20.7 270 top
R38  1k  [0603-RES]  97.79,24.79 0 top
R39  1k  [0603-RES]  101.22,24.79 180 top
R40  1k  [0603-RES]  96.27,18.29 0 top
R41  1k  [0603-RES]  100.08,18.29 180 top
R42  200k  [0603-RES]  100.91,21.99 270 top
R43  10k  [0603-RES]  116.84,20.7 270 top
R44  1k  [0603-RES]  112.27,24.79 0 top
R45  1k  [0603-RES]  115.7,24.79 180 top
R46  1k  [0603-RES]  110.74,18.29 0 top
R47  1k  [0603-RES]  114.55,18.29 180 top
R48  200k  [0603-RES]  115.39,21.99 270 top
R49  10k  [0603-RES]  15.49,41.02 270 top
R50  1k  [0603-RES]  10.92,45.11 0 top
R51  1k  [0603-RES]  14.35,45.11 180 top
R52  1k  [0603-RES]  9.4,38.61 0 top
R53  1k  [0603-RES]  13.21,38.61 180 top
R54  200k  [0603-RES]  14.04,42.31 270 top
R55  10k  [0603-RES]  29.97,41.02 270 top
R56  1k  [0603-RES]  25.4,45.11 0 top
R57  1k  [0603-RES]  28.83,45.11 180 top
R58  1k  [0603-RES]  23.88,38.61 0 top
R59  1k  [0603-RES]  27.69,38.61 180 top
R60  200k  [0603-RES]  28.52,42.31 270 top
R61  10k  [0603-RES]  44.45,41.02 270 top
R62  1k  [0603-RES]  39.88,45.11 0 top
R63  1k  [0603-RES]  43.31,45.11 180 top
R64  1k  [0603-RES]  38.35,38.61 0 top
R65  1k  [0603-RES]  42.16,38.61 180 top
R66  200k  [0603-RES]  43,42.31 270 top
R67  10k  [0603-RES]  58.93,41.02 270 top
R68  1k  [0603-RES]  54.36,45.11 0 top
R69  1k  [0603-RES]  57.78,45.11 180 top
R70  1k  [0603-RES]  52.83,38.61 0 top
R71  1k  [0603-RES]  56.64,38.61 180 top
R72  200k  [0603-RES]  57.48,42.31 270 top
R73  10k  [0603-RES]  73.41,41.02 270 top
R74  1k  [0603-RES]  68.83,45.11 0 top
R75  1k  [0603-RES]  72.26,45.11 180 top
R76  1k  [0603-RES]  67.31,38.61 0 top
R77  1k  [0603-RES]  71.12,38.61 180 top
R78  200k  [0603-RES]  71.95,42.31 270 top
R79  10k  [0603-RES]  87.88,41.02 270 top
R80  1k  [0603-RES]  83.31,45.11 0 top
R81  1k  [0603-RES]  86.74,45.11 180 top
R82  1k  [0603-RES]  81.79,38.61 0 top
R83  1k  [0603-RES]  85.6,38.61 180 top
R84  200k  [0603-RES]  86.43,42.31 270 top
R85  10k  [0603-RES]  102.36,41.02 270 top
R86  1k  [0603-RES]  97.79,45.11 0 top
R87  1k  [0603-RES]  101.22,45.11 180 top
R88  1k  [0603-RES]  96.27,38.61 0 top
R89  1k  [0603-RES]  100.08,38.61 180 top
R90  200k  [0603-RES]  100.91,42.31 270 top
R91  10k  [0603-RES]  116.84,41.02 270 top
R92  1k  [0603-RES]  112.27,45.11 0 top
R93  1k  [0603-RES]  115.7,45.11 180 top
R94  1k  [0603-RES]  110.74,38.61 0 top
R95  1k  [0603-RES]  114.55,38.61 180 top
R96  200k  [0603-RES]  115.39,42.31 270 top
R97  10k  [0603-RES]  15.49,61.34 270 top
R98  1k  [0603-RES]  10.92,65.43 0 top
R99  1k  [0603-RES]  14.35,65.43 180 top
R100  1k  [0603-RES]  9.4,58.93 0 top
R101  1k  [0603-RES]  13.21,58.93 180 top
R102  200k  [0603-RES]  14.04,62.63 270 top
R103  10k  [0603-RES]  29.97,61.34 270 top
R104  1k  [0603-RES]  25.4,65.43 0 top
R105  1k  [0603-RES]  28.83,65.43 180 top
R106  1k  [0603-RES]  23.88,58.93 0 top
R107  1k  [0603-RES]  27.69,58.93 180 top
R108  200k  [0603-RES]  28.52,62.63 270 top
R109  10k  [0603-RES]  44.45,61.34 270 top
R110  1k  [0603-RES]  39.88,65.43 0 top
R111  1k  [0603-RES]  43.31,65.43 180 top
R112  1k  [0603-RES]  38.35,58.93 0 top
R113  1k  [0603-RES]  42.16,58.93 180 top
R114  200k  [0603-RES]  43,62.63 270 top
R115  10k  [0603-RES]  58.93,61.34 270 top
R116  1k  [0603-RES]  54.36,65.43 0 top
R117  1k  [0603-RES]  57.78,65.43 180 top
R118  1k  [0603-RES]  52.83,58.93 0 top
R119  1k  [0603-RES]  56.64,58.93 180 top
R120  200k  [0603-RES]  57.48,62.63 270 top
R121  10k  [0603-RES]  73.41,61.34 270 top
R122  1k  [0603-RES]  68.83,65.43 0 top
R123  1k  [0603-RES]  72.26,65.43 180 top
R124  1k  [0603-RES]  67.31,58.93 0 top
R125  1k  [0603-RES]  71.12,58.93 180 top
R126  200k  [0603-RES]  71.95,62.63 270 top
R127  10k  [0603-RES]  87.88,61.34 270 top
R128  1k  [0603-RES]  83.31,65.43 0 top
R129  1k  [0603-RES]  86.74,65.43 180 top
R130  1k  [0603-RES]  81.79,58.93 0 top
R131  1k  [0603-RES]  85.6,58.93 180 top
R132  200k  [0603-RES]  86.43,62.63 270 top
R133  10k  [0603-RES]  102.36,61.34 270 top
R134  1k  [0603-RES]  97.79,65.43 0 top
R135  1k  [0603-RES]  101.22,65.43 180 top
R136  1k  [0603-RES]  96.27,58.93 0 top
R137  1k  [0603-RES]  100.08,58.93 180 top
R138  200k  [0603-RES]  100.91,62.63 270 top
R139  10k  [0603-RES]  116.84,61.34 270 top
R140  1k  [0603-RES]  112.27,65.43 0 top
R141  1k  [0603-RES]  115.7,65.43 180 top
R142  1k  [0603-RES]  110.74,58.93 0 top
R143  1k  [0603-RES]  114.55,58.93 180 top
R144  200k  [0603-RES]  115.39,62.63 270 top
R145  10k  [0603-RES]  15.49,81.66 270 top
R146  1k  [0603-RES]  10.92,85.75 0 top
R147  1k  [0603-RES]  14.35,85.75 180 top
R148  1k  [0603-RES]  9.4,79.25 0 top
R149  1k  [0603-RES]  13.21,79.25 180 top
R150  200k  [0603-RES]  14.04,82.95 270 top
R151  10k  [0603-RES]  29.97,81.66 270 top
R152  1k  [0603-RES]  25.4,85.75 0 top
R153  1k  [0603-RES]  28.83,85.75 180 top
R154  1k  [0603-RES]  23.88,79.25 0 top
R155  1k  [0603-RES]  27.69,79.25 180 top
R156  200k  [0603-RES]  28.52,82.95 270 top
R157  10k  [0603-RES]  44.45,81.66 270 top
R158  1k  [0603-RES]  39.88,85.75 0 top
R159  1k  [0603-RES]  43.31,85.75 180 top
R160  1k  [0603-RES]  38.35,79.25 0 top
R161  1k  [0603-RES]  42.16,79.25 180 top
R162  200k  [0603-RES]  43,82.95 270 top
R163  10k  [0603-RES]  58.93,81.66 270 top
R164  1k  [0603-RES]  54.36,85.75 0 top
R165  1k  [0603-RES]  57.78,85.75 180 top
R166  1k  [0603-RES]  52.83,79.25 0 top
R167  1k  [0603-RES]  56.64,79.25 180 top
R168  200k  [0603-RES]  57.48,82.95 270 top
R169  10k  [0603-RES]  73.41,81.66 270 top
R170  1k  [0603-RES]  68.83,85.75 0 top
R171  1k  [0603-RES]  72.26,85.75 180 top
R172  1k  [0603-RES]  67.31,79.25 0 top
R173  1k  [0603-RES]  71.12,79.25 180 top
R174  200k  [0603-RES]  71.95,82.95 270 top
R175  10k  [0603-RES]  87.88,81.66 270 top
R176  1k  [0603-RES]  83.31,85.75 0 top
R177  1k  [0603-RES]  86.74,85.75 180 top
R178  1k  [0603-RES]  81.79,79.25 0 top
R179  1k  [0603-RES]  85.6,79.25 180 top
R180  200k  [0603-RES]  86.43,82.95 270 top
R181  10k  [0603-RES]  102.36,81.66 270 top
R182  1k  [0603-RES]  97.79,85.75 0 top
R183  1k  [0603-RES]  101.22,85.75 180 top
R184  1k  [0603-RES]  96.27,79.25 0 top
R185  1k  [0603-RES]  100.08,79.25 180 top
R186  200k  [0603-RES]  100.91,82.95 270 top
R187  10k  [0603-RES]  116.84,81.66 270 top
R188  1k  [0603-RES]  112.27,85.75 0 top
R189  1k  [0603-RES]  115.7,85.75 180 top
R190  1k  [0603-RES]  110.74,79.25 0 top
R191  1k  [0603-RES]  114.55,79.25 180 top
R192  200k  [0603-RES]  115.39,82.95 270 top
R193  10k  [0603-RES]  15.49,101.98 270 top
R194  1k  [0603-RES]  10.92,106.07 0 top
R195  1k  [0603-RES]  14.35,106.07 180 top
R196  1k  [0603-RES]  9.4,99.57 0 top
R197  1k  [0603-RES]  13.21,99.57 180 top
R198  200k  [0603-RES]  14.04,103.27 270 top
R199  10k  [0603-RES]  29.97,101.98 270 top
R200  1k  [0603-RES]  25.4,106.07 0 top
R201  1k  [0603-RES]  28.83,106.07 180 top
R202  1k  [0603-RES]  23.88,99.57 0 top
R203  1k  [0603-RES]  27.69,99.57 180 top
R204  200k  [0603-RES]  28.52,103.27 270 top
R205  10k  [0603-RES]  44.45,101.98 270 top
R206  1k  [0603-RES]  39.88,106.07 0 top
R207  1k  [0603-RES]  43.31,106.07 180 top
R208  1k  [0603-RES]  38.35,99.57 0 top
R209  1k  [0603-RES]  42.16,99.57 180 top
R210  200k  [0603-RES]  43,103.27 270 top
R211  10k  [0603-RES]  58.93,101.98 270 top
R212  1k  [0603-RES]  54.36,106.07 0 top
R213  1k  [0603-RES]  57.78,106.07 180 top
R214  1k  [0603-RES]  52.83,99.57 0 top
R215  1k  [0603-RES]  56.64,99.57 180 top
R216  200k  [0603-RES]  57.48,103.27 270 top
R217  10k  [0603-RES]  73.41,101.98 270 top
R218  1k  [0603-RES]  68.83,106.07 0 top
R219  1k  [0603-RES]  72.26,106.07 180 top
R220  1k  [0603-RES]  67.31,99.57 0 top
R221  1k  [0603-RES]  71.12,99.57 180 top
R222  200k  [0603-RES]  71.95,103.27 270 top
R223  10k  [0603-RES]  87.88,101.98 270 top
R224  1k  [0603-RES]  83.31,106.07 0 top
R225  1k  [0603-RES]  86.74,106.07 180 top
R226  1k  [0603-RES]  81.79,99.57 0 top
R227  1k  [0603-RES]  85.6,99.57 180 top
R228  200k  [0603-RES]  86.43,103.27 270 top
R229  10k  [0603-RES]  102.36,101.98 270 top
R230  1k  [0603-RES]  97.79,106.07 0 top
R231  1k  [0603-RES]  101.22,106.07 180 top
R232  1k  [0603-RES]  96.27,99.57 0 top
R233  1k  [0603-RES]  100.08,99.57 180 top
R234  200k  [0603-RES]  100.91,103.27 270 top
R235  10k  [0603-RES]  116.84,101.98 270 top
R236  1k  [0603-RES]  112.27,106.07 0 top
R237  1k  [0603-RES]  115.7,106.07 180 top
R238  1k  [0603-RES]  110.74,99.57 0 top
R239  1k  [0603-RES]  114.55,99.57 180 top
R240  200k  [0603-RES]  115.39,103.27 270 top
R241  10k  [0603-RES]  15.49,122.3 270 top
R242  1k  [0603-RES]  10.92,126.39 0 top
R243  1k  [0603-RES]  14.35,126.39 180 top
R244  1k  [0603-RES]  9.4,119.89 0 top
R245  1k  [0603-RES]  13.21,119.89 180 top
R246  200k  [0603-RES]  14.04,123.59 270 top
R247  10k  [0603-RES]  29.97,122.3 270 top
R248  1k  [0603-RES]  25.4,126.39 0 top
R249  1k  [0603-RES]  28.83,126.39 180 top
R250  1k  [0603-RES]  23.88,119.89 0 top
R251  1k  [0603-RES]  27.69,119.89 180 top
R252  200k  [0603-RES]  28.52,123.59 270 top
R253  10k  [0603-RES]  44.45,122.3 270 top
R254  1k  [0603-RES]  39.88,126.39 0 top
R255  1k  [0603-RES]  43.31,126.39 180 top
R256  1k  [0603-RES]  38.35,119.89 0 top
R257  1k  [0603-RES]  42.16,119.89 180 top
R258  200k  [0603-RES]  43,123.59 270 top
R259  10k  [0603-RES]  58.93,122.3 270 top
R260  1k  [0603-RES]  54.36,126.39 0 top
R261  1k  [0603-RES]  57.78,126.39 180 top
R262  1k  [0603-RES]  52.83,119.89 0 top
R263  1k  [0603-RES]  56.64,119.89 180 top
R264  200k  [0603-RES]  57.48,123.59 270 top
R265  10k  [0603-RES]  73.41,122.3 270 top
R266  1k  [0603-RES]  68.83,126.39 0 top
R267  1k  [0603-RES]  72.26,126.39 180 top
R268  1k  [0603-RES]  67.31,119.89 0 top
R269  1k  [0603-RES]  71.12,119.89 180 top
R270  200k  [0603-RES]  71.95,123.59 270 top
R271  10k  [0603-RES]  87.88,122.3 270 top
R272  1k  [0603-RES]  83.31,126.39 0 top
R273  1k  [0603-RES]  86.74,126.39 180 top
R274  1k  [0603-RES]  81.79,119.89 0 top
R275  1k  [0603-RES]  85.6,119.89 180 top
R276  200k  [0603-RES]  86.43,123.59 270 top
R277  10k  [0603-RES]  102.36,122.3 270 top
R278  1k  [0603-RES]  97.79,126.39 0 top
R279  1k  [0603-RES]  101.22,126.39 180 top
R280  1k  [0603-RES]  96.27,119.89 0 top
R281  1k  [0603-RES]  100.08,119.89 180 top
R282  200k  [0603-RES]  100.91,123.59 270 top
R283  10k  [0603-RES]  116.84,122.3 270 top
R284  1k  [0603-RES]  112.27,126.39 0 top
R285  1k  [0603-RES]  115.7,126.39 180 top
R286  1k  [0603-RES]  110.74,119.89 0 top
R287  1k  [0603-RES]  114.55,119.89 180 top
R288  200k  [0603-RES]  115.39,123.59 270 top
U1  MMA8452QMMA8452Q-1:1  [MMA8452Q-1:1]  18.29,21.59 270 top
U2  MIC5205-3.3V  [SOT23-5]  18.92,13.97 0 top
U3  PCA9306  [PCA9306DC-1:1]  11.94,21.59 180 top
U4  PCA9306  [PCA9306DC-1:1]  26.42,21.59 180 top
U5  MMA8452QMMA8452Q-1:1  [MMA8452Q-1:1]  32.77,21.59 270 top
U6  MIC5205-3.3V  [SOT23-5]  33.4,13.97 0 top
U7  PCA9306  [PCA9306DC-1:1]  40.89,21.59 180 top
U8  MMA8452QMMA8452Q-1:1  [MMA8452Q-1:1]  47.24,21.59 270 top
U9  MIC5205-3.3V  [SOT23-5]  47.88,13.97 0 top
U10  PCA9306  [PCA9306DC-1:1]  55.37,21.59 180 top
U11  MMA8452QMMA8452Q-1:1  [MMA8452Q-1:1]  61.72,21.59 270 top
U12  MIC5205-3.3V  [SOT23-5]  62.36,13.97 0 top
U13  PCA9306  [PCA9306DC-1:1]  69.85,21.59 180 top
U14  MMA8452QMMA8452Q-1:1  [MMA8452Q-1:1]  76.2,21.59 270 top
U15  MIC5205-3.3V  [SOT23-5]  76.83,13.97 0 top
U16  PCA9306  [PCA9306DC-1:1]  84.33,21.59 180 top
U17  MMA8452QMMA8452Q-1:1  [MMA8452Q-1:1]  90.68,21.59 270 top
U18  MIC5205-3.3V  [SOT23-5]  91.31,13.97 0 top
U19  PCA9306  [PCA9306DC-1:1]  98.81,21.59 180 top
U20  MMA8452QMMA8452Q-1:1  [MMA8452Q-1:1]  105.16,21.59 270 top
U21  MIC5205-3.3V  [SOT23-5]  105.79,13.97 0 top
U22  PCA9306  [PCA9306DC-1:1]  113.28,21.59 180 top
U23  MMA8452QMMA8452Q-1:1  [MMA8452Q-1:1]  119.63,21.59 270 top
U24  MIC5205-3.3V  [SOT23-5]  120.27,13.97 0 top
U25  PCA9306  [PCA9306DC-1:1]  11.94,41.91 180 top
U26  MMA8452QMMA8452Q-1:1  [MMA8452Q-1:1]  18.29,41.91 270 top
U27  MIC5205-3.3V  [SOT23-5]  18.92,34.29 0 top
U28  PCA9306  [PCA9306DC-1:1]  26.42,41.91 180 top
U29  MMA8452QMMA8452Q-1:1  [MMA8452Q-1:1]  32.77,41.91 270 top
U30  MIC5205-3.3V  [SOT23-5]  33.4,34.29 0 top
U31  PCA9306  [PCA9306DC-1:1]  40.89,41.91 180 top
U32  MMA8452QMMA8452Q-1:1  [MMA8452Q-1:1]  47.24,41.91 270 top
U33  MIC5205-3.3V  [SOT23-5]  47.88,34.29 0 top
U34  PCA9306  [PCA9306DC-1:1]  55.37,41.91 180 top
U35  MMA8452QMMA8452Q-1:1  [MMA8452Q-1:1]  61.72,41.91 270 top
U36  MIC5205-3.3V  [SOT23-5]  62.36,34.29 0 top
U37  PCA9306  [PCA9306DC-1:1]  69.85,41.91 180 top
U38  MMA8452QMMA8452Q-1:1  [MMA8452Q-1:1]  76.2,41.91 270 top
U39  MIC5205-3.3V  [SOT23-5]  76.83,34.29 0 top
U40  PCA9306  [PCA9306DC-1:1]  84.33,41.91 180 top
U41  MMA8452QMMA8452Q-1:1  [MMA8452Q-1:1]  90.68,41.91 270 top
U42  MIC5205-3.3V  [SOT23-5]  91.31,34.29 0 top
U43  PCA9306  [PCA9306DC-1:1]  98.81,41.91 180 top
U44  MMA8452QMMA8452Q-1:1  [MMA8452Q-1:1]  105.16,41.91 270 top
U45  MIC5205-3.3V  [SOT23-5]  105.79,34.29 0 top
U46  PCA9306  [PCA9306DC-1:1]  113.28,41.91 180 top
U47  MMA8452QMMA8452Q-1:1  [MMA8452Q-1:1]  119.63,41.91 270 top
U48  MIC5205-3.3V  [SOT23-5]  120.27,34.29 0 top
U49  PCA9306  [PCA9306DC-1:1]  11.94,62.23 180 top
U50  MMA8452QMMA8452Q-1:1  [MMA8452Q-1:1]  18.29,62.23 270 top
U51  MIC5205-3.3V  [SOT23-5]  18.92,54.61 0 top
U52  PCA9306  [PCA9306DC-1:1]  26.42,62.23 180 top
U53  MMA8452QMMA8452Q-1:1  [MMA8452Q-1:1]  32.77,62.23 270 top
U54  MIC5205-3.3V  [SOT23-5]  33.4,54.61 0 top
U55  PCA9306  [PCA9306DC-1:1]  40.89,62.23 180 top
U56  MMA8452QMMA8452Q-1:1  [MMA8452Q-1:1]  47.24,62.23 270 top
U57  MIC5205-3.3V  [SOT23-5]  47.88,54.61 0 top
U58  PCA9306  [PCA9306DC-1:1]  55.37,62.23 180 top
U59  MMA8452QMMA8452Q-1:1  [MMA8452Q-1:1]  61.72,62.23 270 top
U60  MIC5205-3.3V  [SOT23-5]  62.36,54.61 0 top
U61  PCA9306  [PCA9306DC-1:1]  69.85,62.23 180 top
U62  MMA8452QMMA8452Q-1:1  [MMA8452Q-1:1]  76.2,62.23 270 top
U63  MIC5205-3.3V  [SOT23-5]  76.83,54.61 0 top
U64  PCA9306  [PCA9306DC-1:1]  84.33,62.23 180 top
U65  MMA8452QMMA8452Q-1:1  [MMA8452Q-1:1]  90.68,62.23 270 top
U66  MIC5205-3.3V  [SOT23-5]  91.31,54.61 0 top
U67  PCA9306  [PCA9306DC-1:1]  98.81,62.23 180 top
U68  MMA8452QMMA8452Q-1:1  [MMA8452Q-1:1]  105.16,62.23 270 top
U69  MIC5205-3.3V  [SOT23-5]  105.79,54.61 0 top
U70  PCA9306  [PCA9306DC-1:1]  113.28,62.23 180 top
U71  MMA8452QMMA8452Q-1:1  [MMA8452Q-1:1]  119.63,62.23 270 top
U72  MIC5205-3.3V  [SOT23-5]  120.27,54.61 0 top
U73  PCA9306  [PCA9306DC-1:1]  11.94,82.55 180 top
U74  MMA8452QMMA8452Q-1:1  [MMA8452Q-1:1]  18.29,82.55 270 top
U75  MIC5205-3.3V  [SOT23-5]  18.92,74.93 0 top
U76  PCA9306  [PCA9306DC-1:1]  26.42,82.55 180 top
U77  MMA8452QMMA8452Q-1:1  [MMA8452Q-1:1]  32.77,82.55 270 top
U78  MIC5205-3.3V  [SOT23-5]  33.4,74.93 0 top
U79  PCA9306  [PCA9306DC-1:1]  40.89,82.55 180 top
U80  MMA8452QMMA8452Q-1:1  [MMA8452Q-1:1]  47.24,82.55 270 top
U81  MIC5205-3.3V  [SOT23-5]  47.88,74.93 0 top
U82  PCA9306  [PCA9306DC-1:1]  55.37,82.55 180 top
U83  MMA8452QMMA8452Q-1:1  [MMA8452Q-1:1]  61.72,82.55 270 top
U84  MIC5205-3.3V  [SOT23-5]  62.36,74.93 0 top
U85  PCA9306  [PCA9306DC-1:1]  69.85,82.55 180 top
U86  MMA8452QMMA8452Q-1:1  [MMA8452Q-1:1]  76.2,82.55 270 top
U87  MIC5205-3.3V  [SOT23-5]  76.83,74.93 0 top
U88  PCA9306  [PCA9306DC-1:1]  84.33,82.55 180 top
U89  MMA8452QMMA8452Q-1:1  [MMA8452Q-1:1]  90.68,82.55 270 top
U90  MIC5205-3.3V  [SOT23-5]  91.31,74.93 0 top
U91  PCA9306  [PCA9306DC-1:1]  98.81,82.55 180 top
U92  MMA8452QMMA8452Q-1:1  [MMA8452Q-1:1]  105.16,82.55 270 top
U93  MIC5205-3.3V  [SOT23-5]  105.79,74.93 0 top
U94  PCA9306  [PCA9306DC-1:1]  113.28,82.55 180 top
U95  MMA8452QMMA8452Q-1:1  [MMA8452Q-1:1]  119.63,82.55 270 top
U96  MIC5205-3.3V  [SOT23-5]  120.27,74.93 0 top
U97  PCA9306  [PCA9306DC-1:1]  11.94,102.87 180 top
U98  MMA8452QMMA8452Q-1:1  [MMA8452Q-1:1]  18.29,102.87 270 top
U99  MIC5205-3.3V  [SOT23-5]  18.92,95.25 0 top
U100  PCA9306  [PCA9306DC-1:1]  26.42,102.87 180 top
U101  MMA8452QMMA8452Q-1:1  [MMA8452Q-1:1]  32.77,102.87 270 top
U102  MIC5205-3.3V  [SOT23-5]  33.4,95.25 0 top
U103  PCA9306  [PCA9306DC-1:1]  40.89,102.87 180 top
U104  MMA8452QMMA8452Q-1:1  [MMA8452Q-1:1]  47.24,102.87 270 top
U105  MIC5205-3.3V  [SOT23-5]  47.88,95.25 0 top
U106  PCA9306  [PCA9306DC-1:1]  55.37,102.87 180 top
U107  MMA8452QMMA8452Q-1:1  [MMA8452Q-1:1]  61.72,102.87 270 top
U108  MIC5205-3.3V  [SOT23-5]  62.36,95.25 0 top
U109  PCA9306  [PCA9306DC-1:1]  69.85,102.87 180 top
U110  MMA8452QMMA8452Q-1:1  [MMA8452Q-1:1]  76.2,102.87 270 top
U111  MIC5205-3.3V  [SOT23-5]  76.83,95.25 0 top
U112  PCA9306  [PCA9306DC-1:1]  84.33,102.87 180 top
U113  MMA8452QMMA8452Q-1:1  [MMA8452Q-1:1]  90.68,102.87 270 top
U114  MIC5205-3.3V  [SOT23-5]  91.31,95.25 0 top
U115  PCA9306  [PCA9306DC-1:1]  98.81,102.87 180 top
U116  MMA8452QMMA8452Q-1:1  [MMA8452Q-1:1]  105.16,102.87 270 top
U117  MIC5205-3.3V  [SOT23-5]  105.79,95.25 0 top
U118  PCA9306  [PCA9306DC-1:1]  113.28,102.87 180 top
U119  MMA8452QMMA8452Q-1:1  [MMA8452Q-1:1]  119.63,102.87 270 top
U120  MIC5205-3.3V  [SOT23-5]  120.27,95.25 0 top
U121  PCA9306  [PCA9306DC-1:1]  11.94,123.19 180 top
U122  MMA8452QMMA8452Q-1:1  [MMA8452Q-1:1]  18.29,123.19 270 top
U123  MIC5205-3.3V  [SOT23-5]  18.92,115.57 0 top
U124  PCA9306  [PCA9306DC-1:1]  26.42,123.19 180 top
U125  MMA8452QMMA8452Q-1:1  [MMA8452Q-1:1]  32.77,123.19 270 top
U126  MIC5205-3.3V  [SOT23-5]  33.4,115.57 0 top
U127  PCA9306  [PCA9306DC-1:1]  40.89,123.19 180 top
U128  MMA8452QMMA8452Q-1:1  [MMA8452Q-1:1]  47.24,123.19 270 top
U129  MIC5205-3.3V  [SOT23-5]  47.88,115.57 0 top
U130  PCA9306  [PCA9306DC-1:1]  55.37,123.19 180 top
U131  MMA8452QMMA8452Q-1:1  [MMA8452Q-1:1]  61.72,123.19 270 top
U132  MIC5205-3.3V  [SOT23-5]  62.36,115.57 0 top
U133  PCA9306  [PCA9306DC-1:1]  69.85,123.19 180 top
U134  MMA8452QMMA8452Q-1:1  [MMA8452Q-1:1]  76.2,123.19 270 top
U135  MIC5205-3.3V  [SOT23-5]  76.83,115.57 0 top
U136  PCA9306  [PCA9306DC-1:1]  84.33,123.19 180 top
U137  MMA8452QMMA8452Q-1:1  [MMA8452Q-1:1]  90.68,123.19 270 top
U138  MIC5205-3.3V  [SOT23-5]  91.31,115.57 0 top
U139  PCA9306  [PCA9306DC-1:1]  98.81,123.19 180 top
U140  MMA8452QMMA8452Q-1:1  [MMA8452Q-1:1]  105.16,123.19 270 top
U141  MIC5205-3.3V  [SOT23-5]  105.79,115.57 0 top
U142  PCA9306  [PCA9306DC-1:1]  113.28,123.19 180 top
U143  MMA8452QMMA8452Q-1:1  [MMA8452Q-1:1]  119.63,123.19 270 top
U144  MIC5205-3.3V  [SOT23-5]  120.27,115.57 0 top

## Library data of the parts
C1 C3-C5 C7-C9 C11-C13 C15-C17 C19-C21 C23-C25 C27-C29 C31-C33 C35-C37 C39-C41 C43-C45 C47-C49 C51-C53 C55-C57 C59-C61 C63-C65 C67-C69 C71-C73 C75-C77 C79-C81 C83-C85 C87-C89 C91-C93 C95-C97 C99-C101 C103-C105 C107-C109 C111-C113 C115-C117 C119-C121 C123-C125 C127-C129 C131-C133 C135-C137 C139-C141 C143-C145 C147-C149 C151-C153 C155-C157 C159-C161 C163-C165 C167-C169 C171-C173 C175-C177 C179-C181 C183-C185 C187-C189 C191 C192 = SparkFun-Capacitors; PROD_ID: CAP-00810
C2 C6 C10 C14 C18 C22 C26 C30 C34 C38 C42 C46 C50 C54 C58 C62 C66 C70 C74 C78 C82 C86 C90 C94 C98 C102 C106 C110 C114 C118 C122 C126 C130 C134 C138 C142 C146 C150 C154 C158 C162 C166 C170 C174 C178 C182 C186 C190 = SparkFun-Capacitors; PROD_ID: CAP-08280
E$1 = SparkFun-Retired
E$2 E$3 FID1-FID96 LOGO1-LOGO96 = SparkFun-Aesthetics
JP1 JP3 JP5 JP7 JP9 JP11 JP13 JP15 JP17 JP19 JP21 JP23 JP25 JP27 JP29 JP31 JP33 JP35 JP37 JP39 JP41 JP43 JP45 JP47 JP49 JP51 JP53 JP55 JP57 JP59 JP61 JP63 JP65 JP67 JP69 JP71 JP73 JP75 JP77 JP79 JP81 JP83 JP85 JP87 JP89 JP91 JP93 JP95 = SparkFun-Connectors; PROD_ID: CONN-11415
JP2 JP4 JP6 JP8 JP10 JP12 JP14 JP16 JP18 JP20 JP22 JP24 JP26 JP28 JP30 JP32 JP34 JP36 JP38 JP40 JP42 JP44 JP46 JP48 JP50 JP52 JP54 JP56 JP58 JP60 JP62 JP64 JP66 JP68 JP70 JP72 JP74 JP76 JP78 JP80 JP82 JP84 JP86 JP88 JP90 JP92 JP94 JP96 = SparkFun-Connectors; PROD_ID: CONN-11290
R1 R7 R13 R19 R25 R31 R37 R43 R49 R55 R61 R67 R73 R79 R85 R91 R97 R103 R109 R115 R121 R127 R133 R139 R145 R151 R157 R163 R169 R175 R181 R187 R193 R199 R205 R211 R217 R223 R229 R235 R241 R247 R253 R259 R265 R271 R277 R283 = SparkFun-Resistors; PROD_ID: RES-00824
R2-R5 R8-R11 R14-R17 R20-R23 R26-R29 R32-R35 R38-R41 R44-R47 R50-R53 R56-R59 R62-R65 R68-R71 R74-R77 R80-R83 R86-R89 R92-R95 R98-R101 R104-R107 R110-R113 R116-R119 R122-R125 R128-R131 R134-R137 R140-R143 R146-R149 R152-R155 R158-R161 R164-R167 R170-R173 R176-R179 R182-R185 R188-R191 R194-R197 R200-R203 R206-R209 R212-R215 R218-R221 R224-R227 R230-R233 R236-R239 R242-R245 R248-R251 R254-R257 R260-R263 R266-R269 R272-R275 R278-R281 R284-R287 = SparkFun-Resistors; PROD_ID: RES-07856
R6 R12 R18 R24 R30 R36 R42 R48 R54 R60 R66 R72 R78 R84 R90 R96 R102 R108 R114 R120 R126 R132 R138 R144 R150 R156 R162 R168 R174 R180 R186 R192 R198 R204 R210 R216 R222 R228 R234 R240 R246 R252 R258 R264 R270 R276 R282 R288 = SparkFun-Resistors; PROD_ID: RES-09385
U1 U5 U8 U11 U14 U17 U20 U23 U26 U29 U32 U35 U38 U41 U44 U47 U50 U53 U56 U59 U62 U65 U68 U71 U74 U77 U80 U83 U86 U89 U92 U95 U98 U101 U104 U107 U110 U113 U116 U119 U122 U125 U128 U131 U134 U137 U140 U143 = SparkFun-Sensors
U2 U6 U9 U12 U15 U18 U21 U24 U27 U30 U33 U36 U39 U42 U45 U48 U51 U54 U57 U60 U63 U66 U69 U72 U75 U78 U81 U84 U87 U90 U93 U96 U99 U102 U105 U108 U111 U114 U117 U120 U123 U126 U129 U132 U135 U138 U141 U144 = SparkFun-PowerIC; PROD_ID: VREG-00822
U3 U4 U7 U10 U13 U16 U19 U22 U25 U28 U31 U34 U37 U40 U43 U46 U49 U52 U55 U58 U61 U64 U67 U70 U73 U76 U79 U82 U85 U88 U91 U94 U97 U100 U103 U106 U109 U112 U115 U118 U121 U124 U127 U130 U133 U136 U139 U142 = SparkFun-DigitalIC